# Altium PCB PCB1.PcbDoc (part 1 of 2)
Units mil, origin at the board's own origin, x right, y up, seen from the top; angles counter-clockwise.
Board outline 3937.01 x 3937.01 mil, 4 copper layers (L1, L2, L3, L4), stack 61.811 mil thick; 100 components, 172 nets, 741 pads, 303 vias.
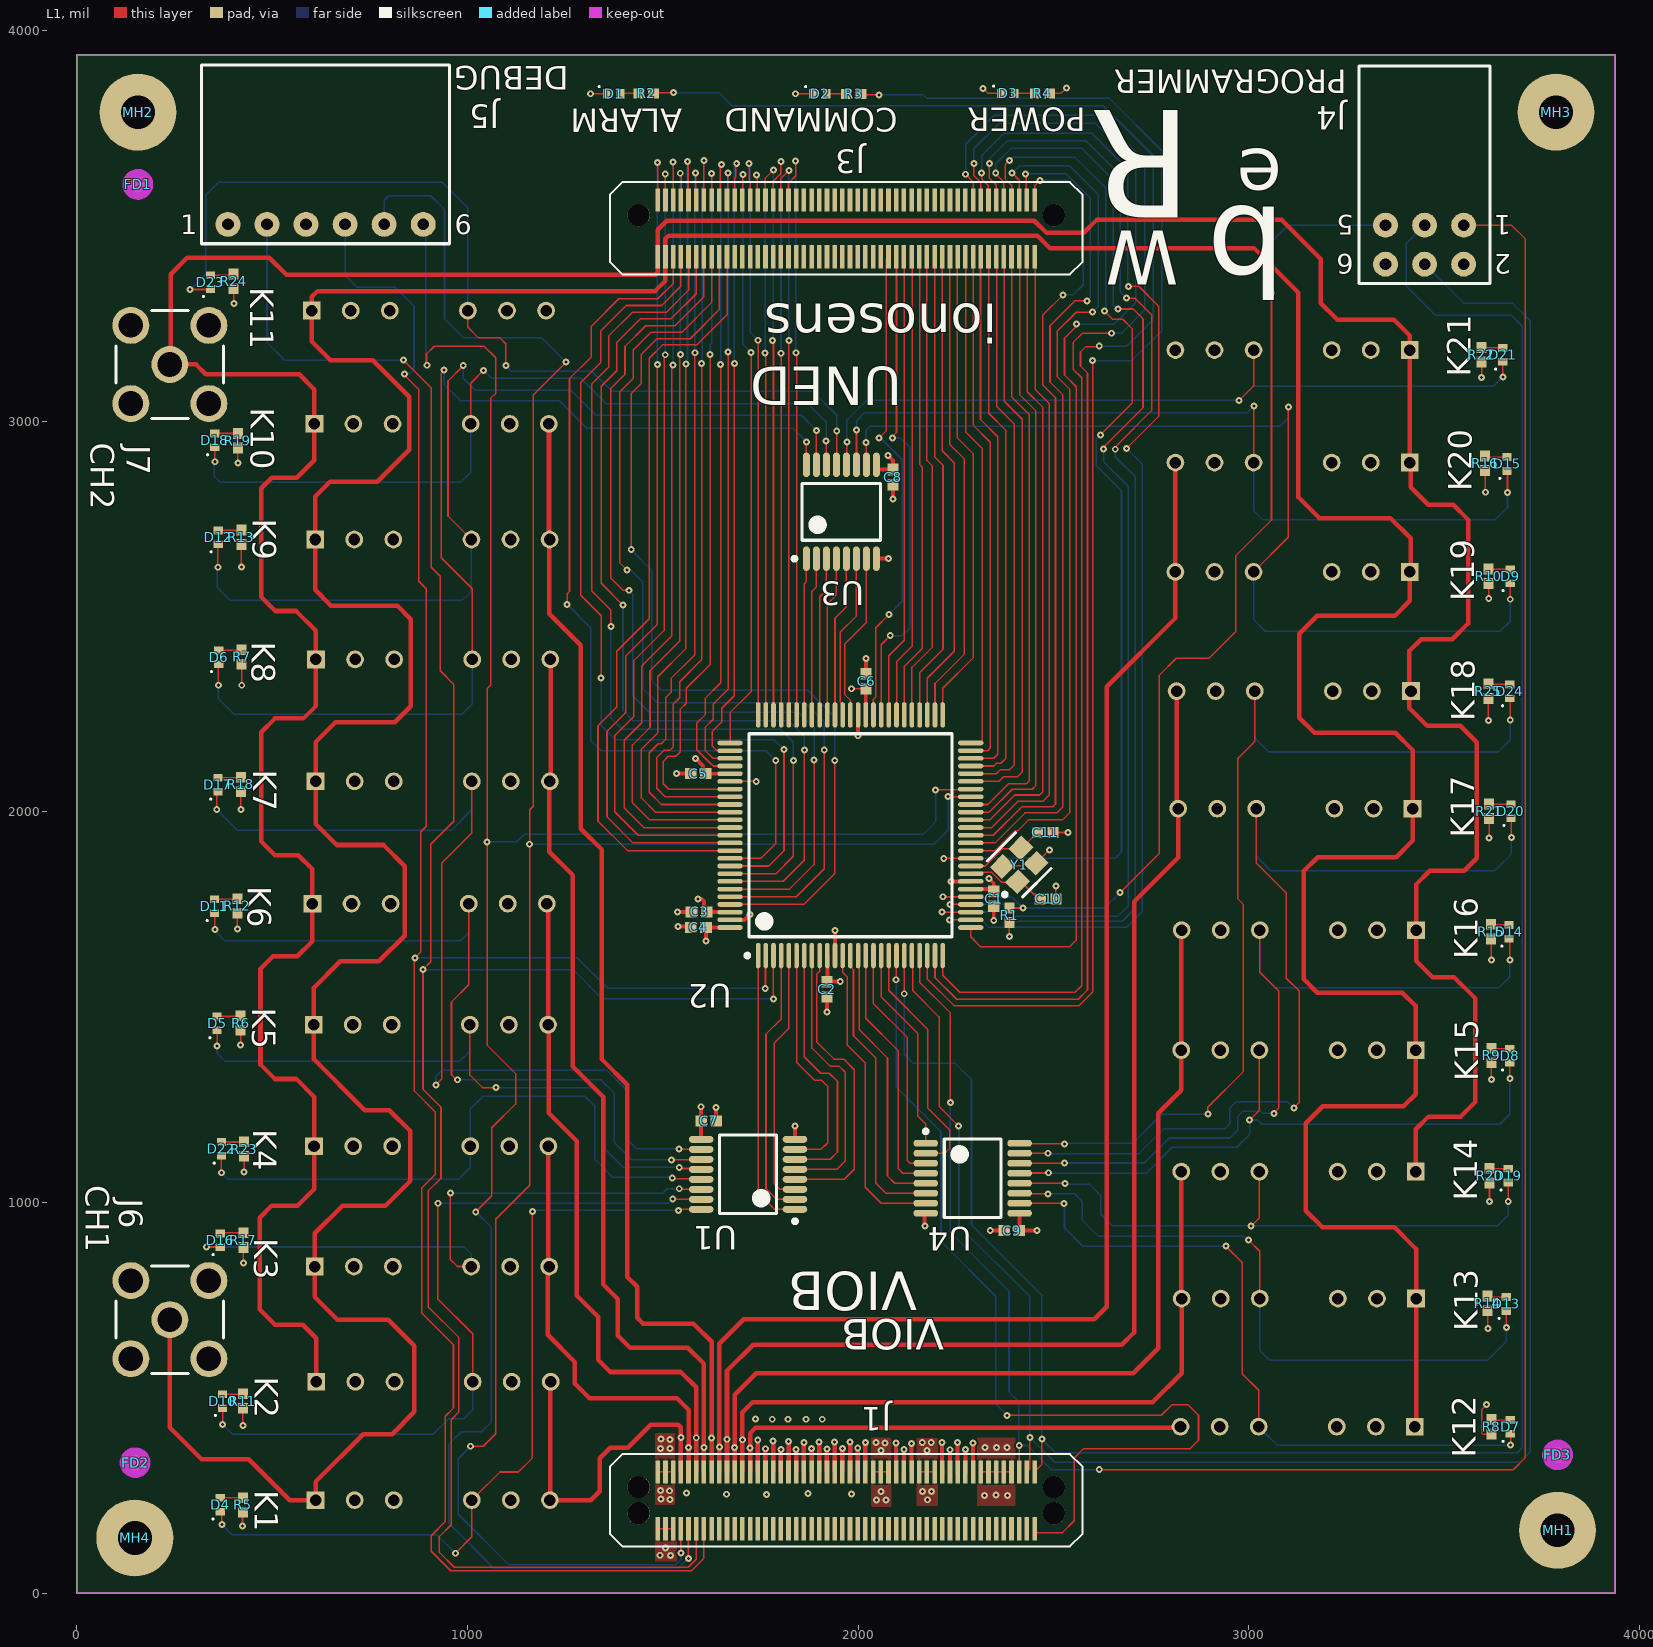
[diagram p0: L1 view]
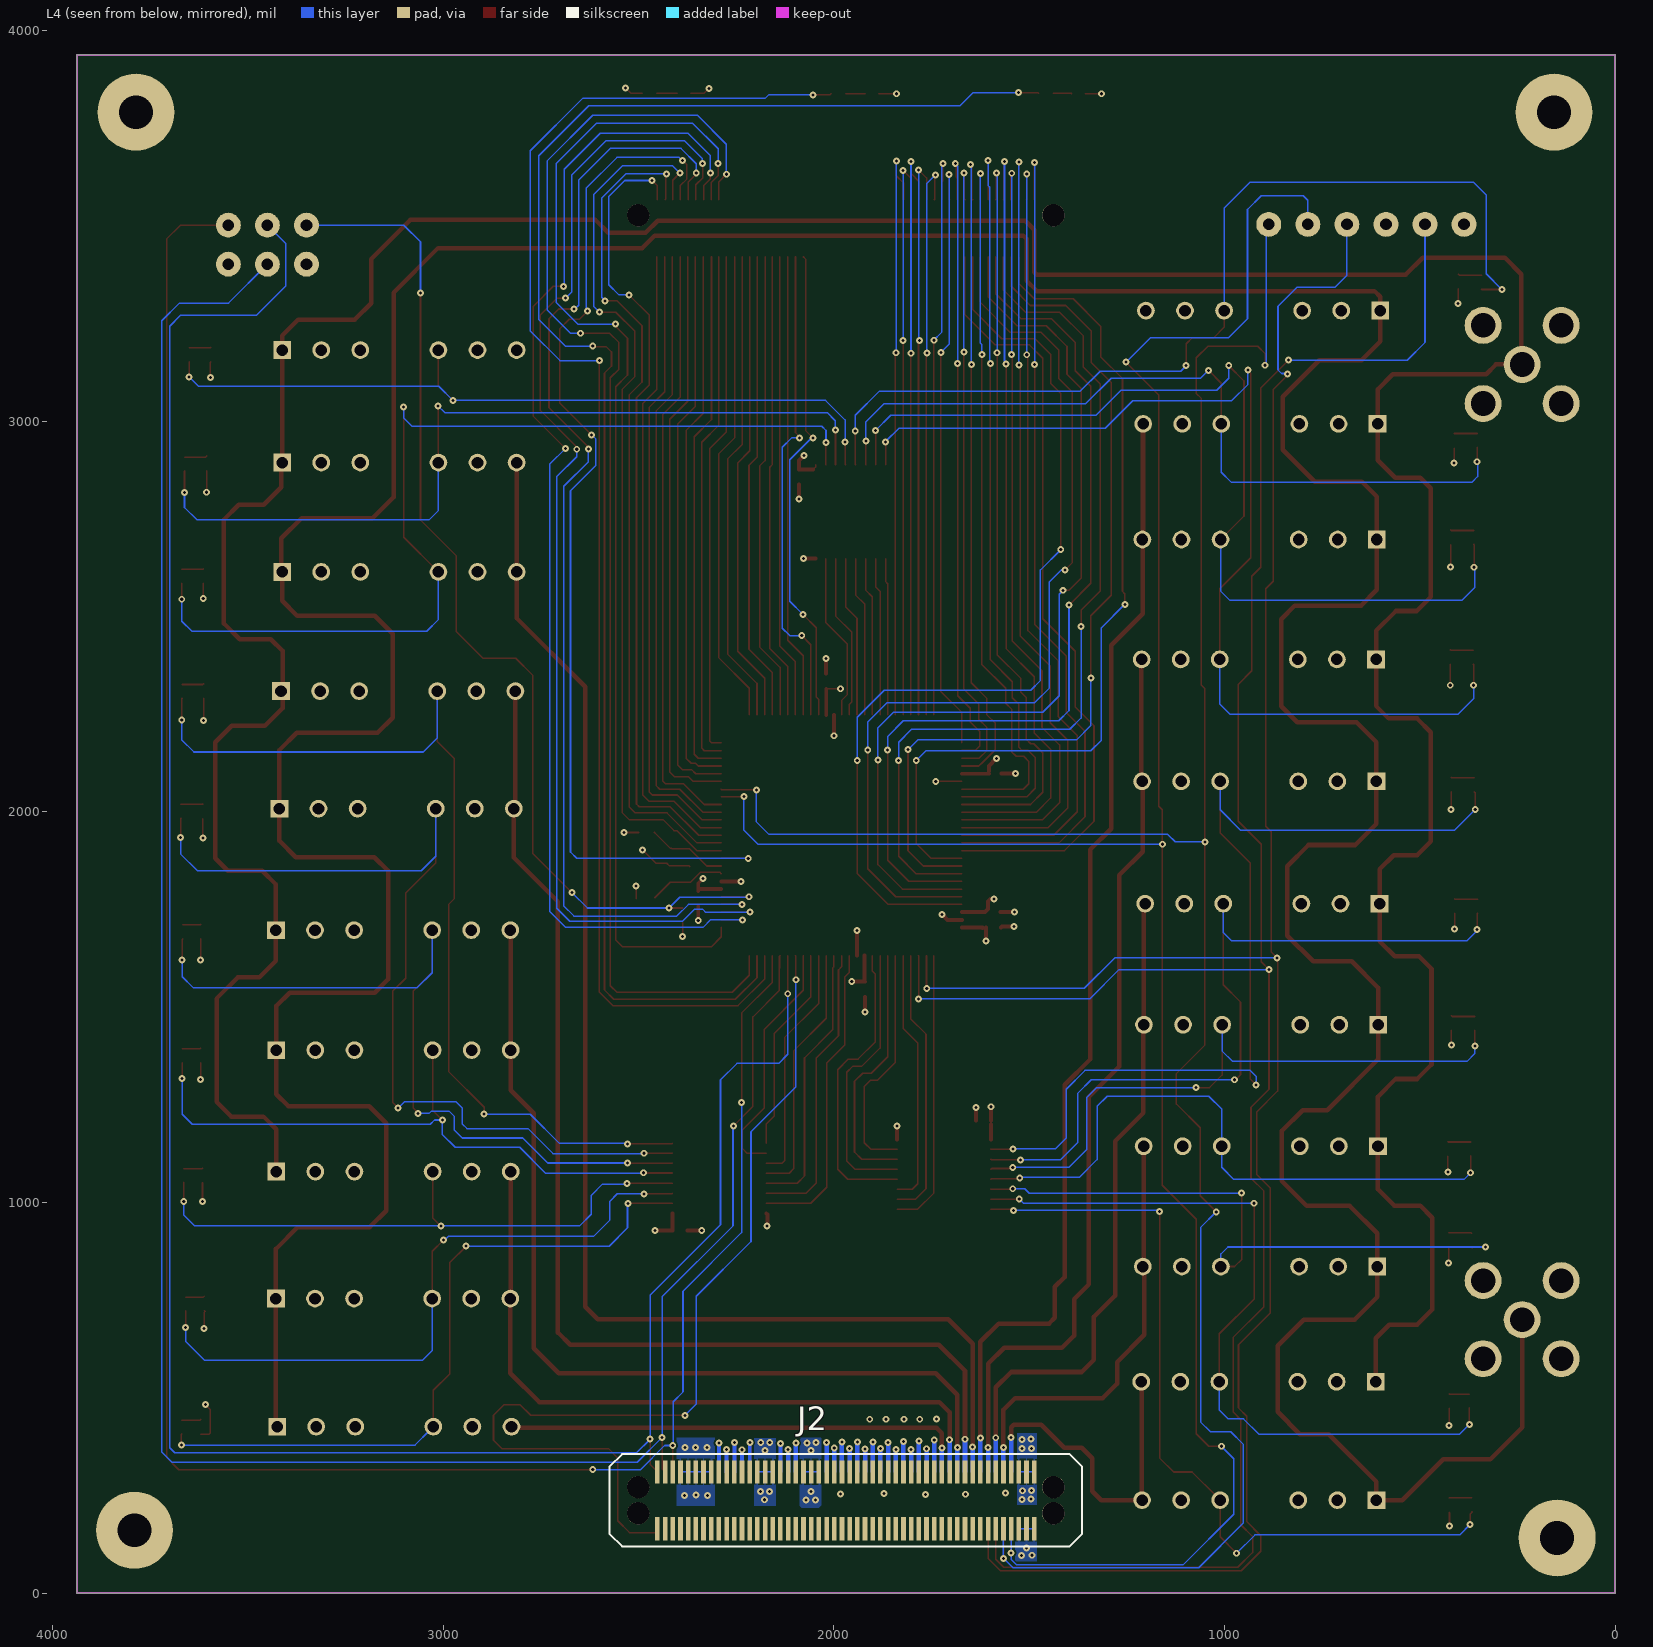
[diagram p1: L4 view, seen from below]
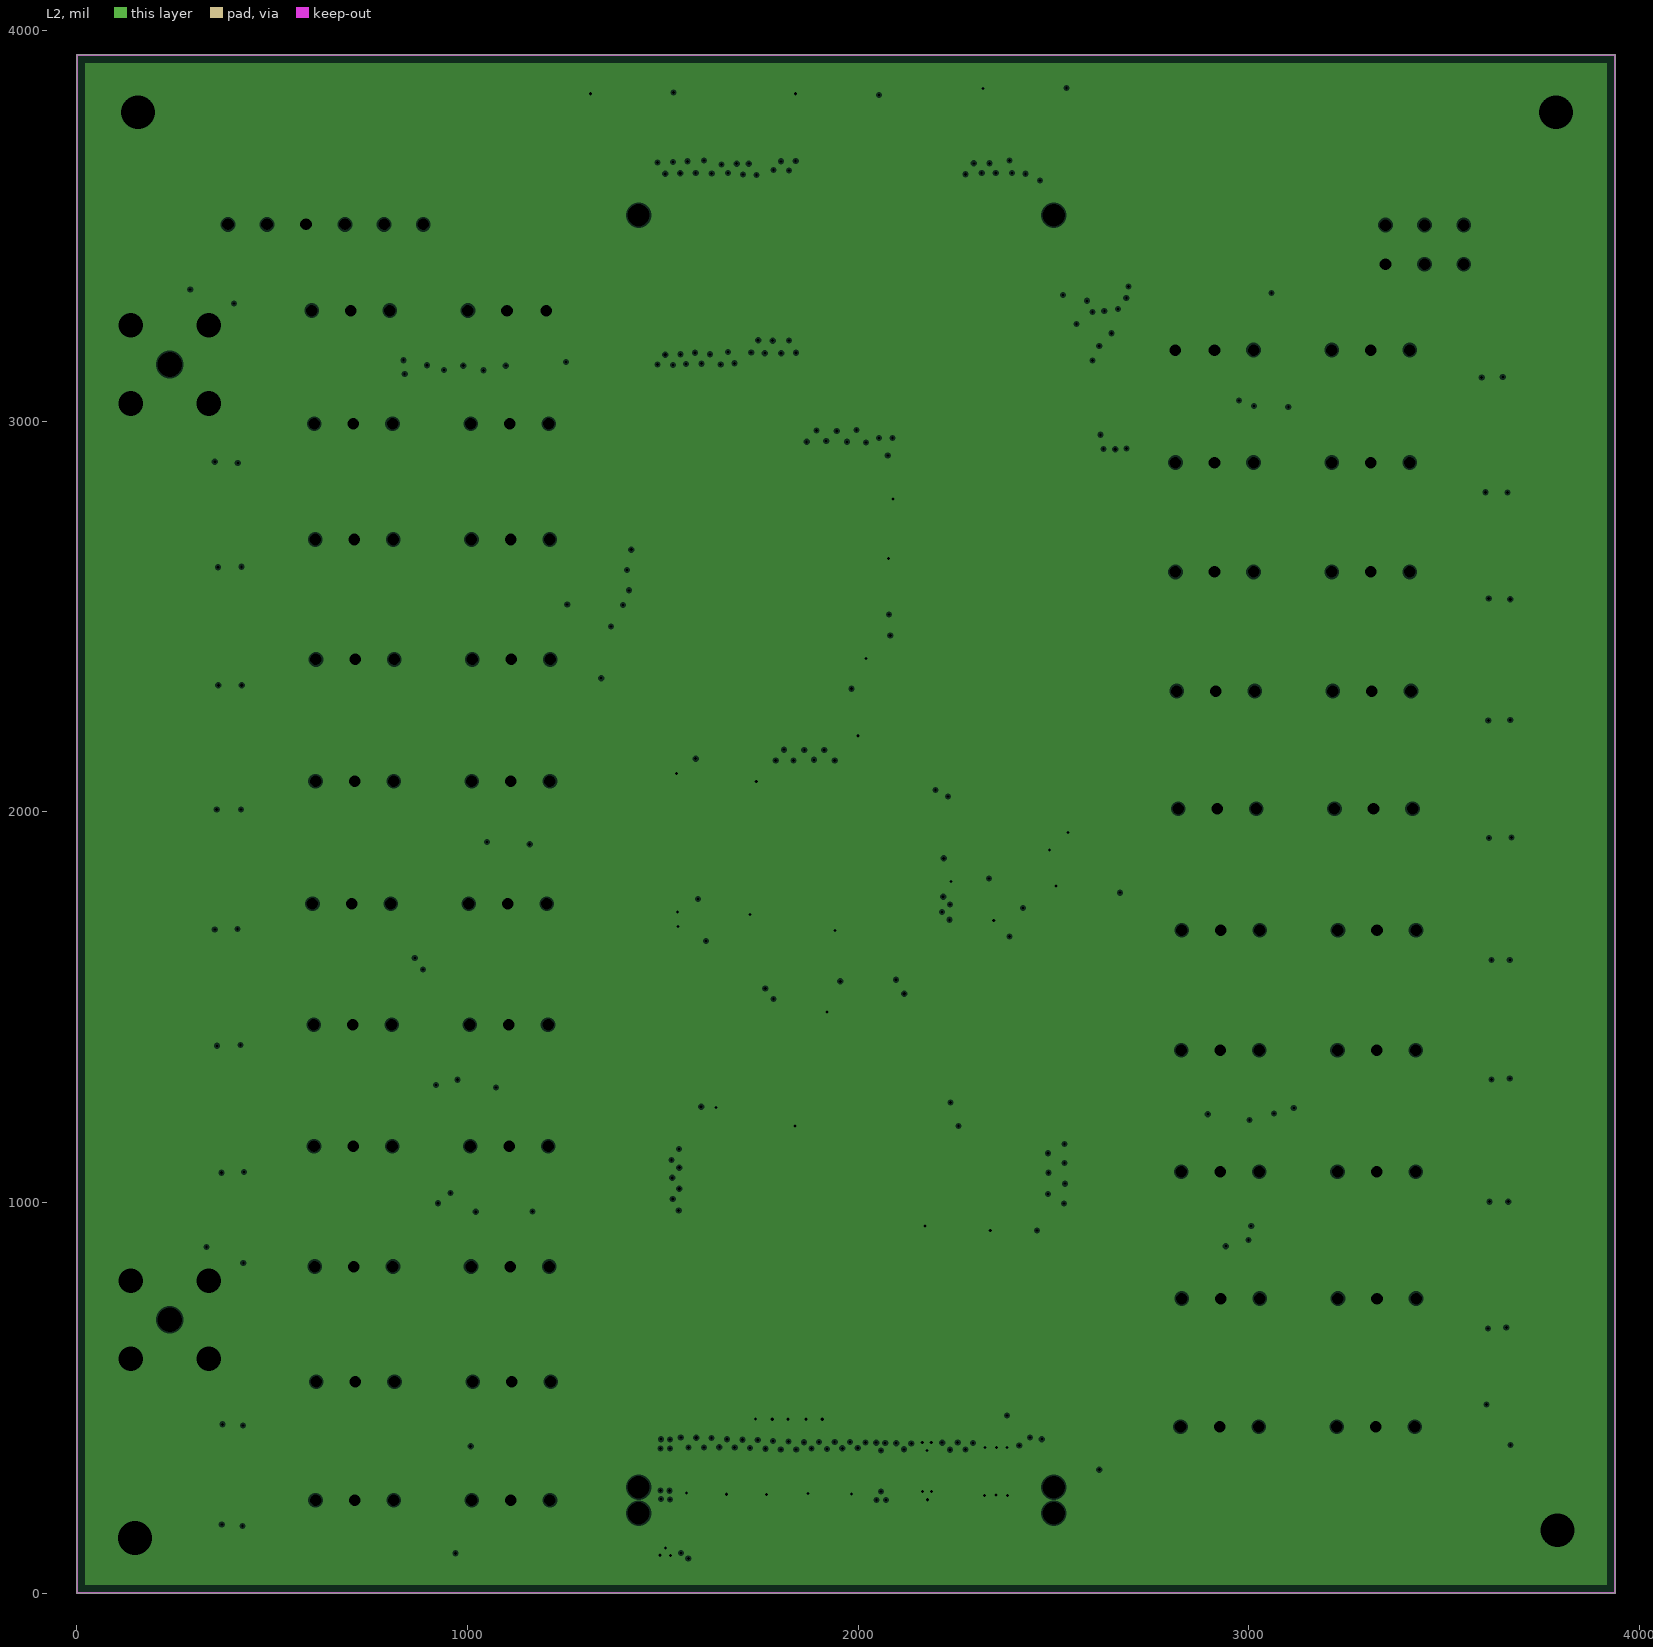
[diagram p2: L2, clearances drawn from the general rule]
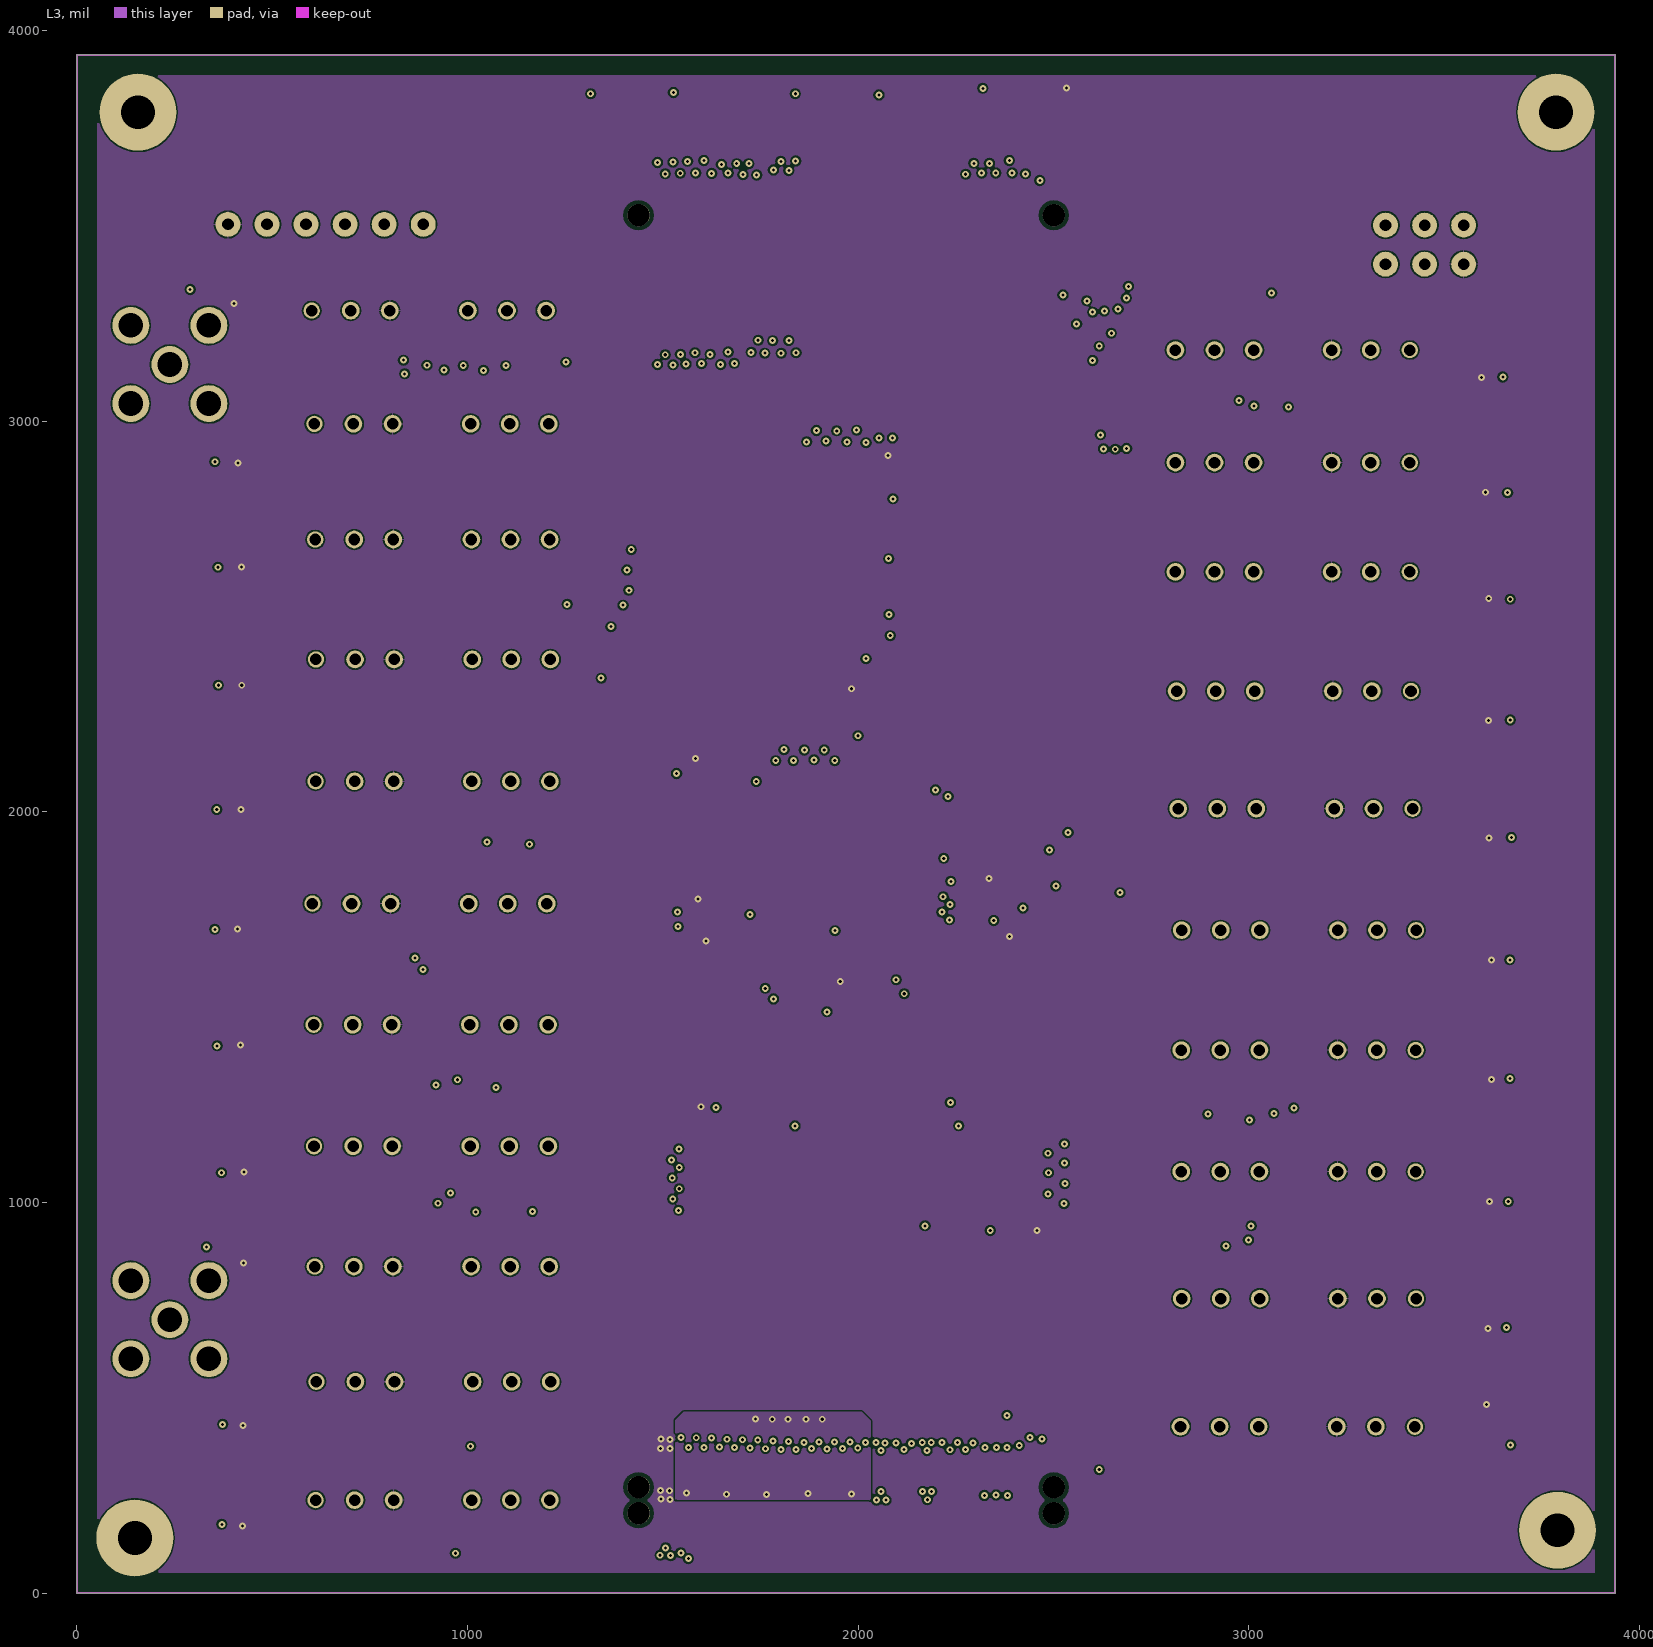
[diagram p3: L3]
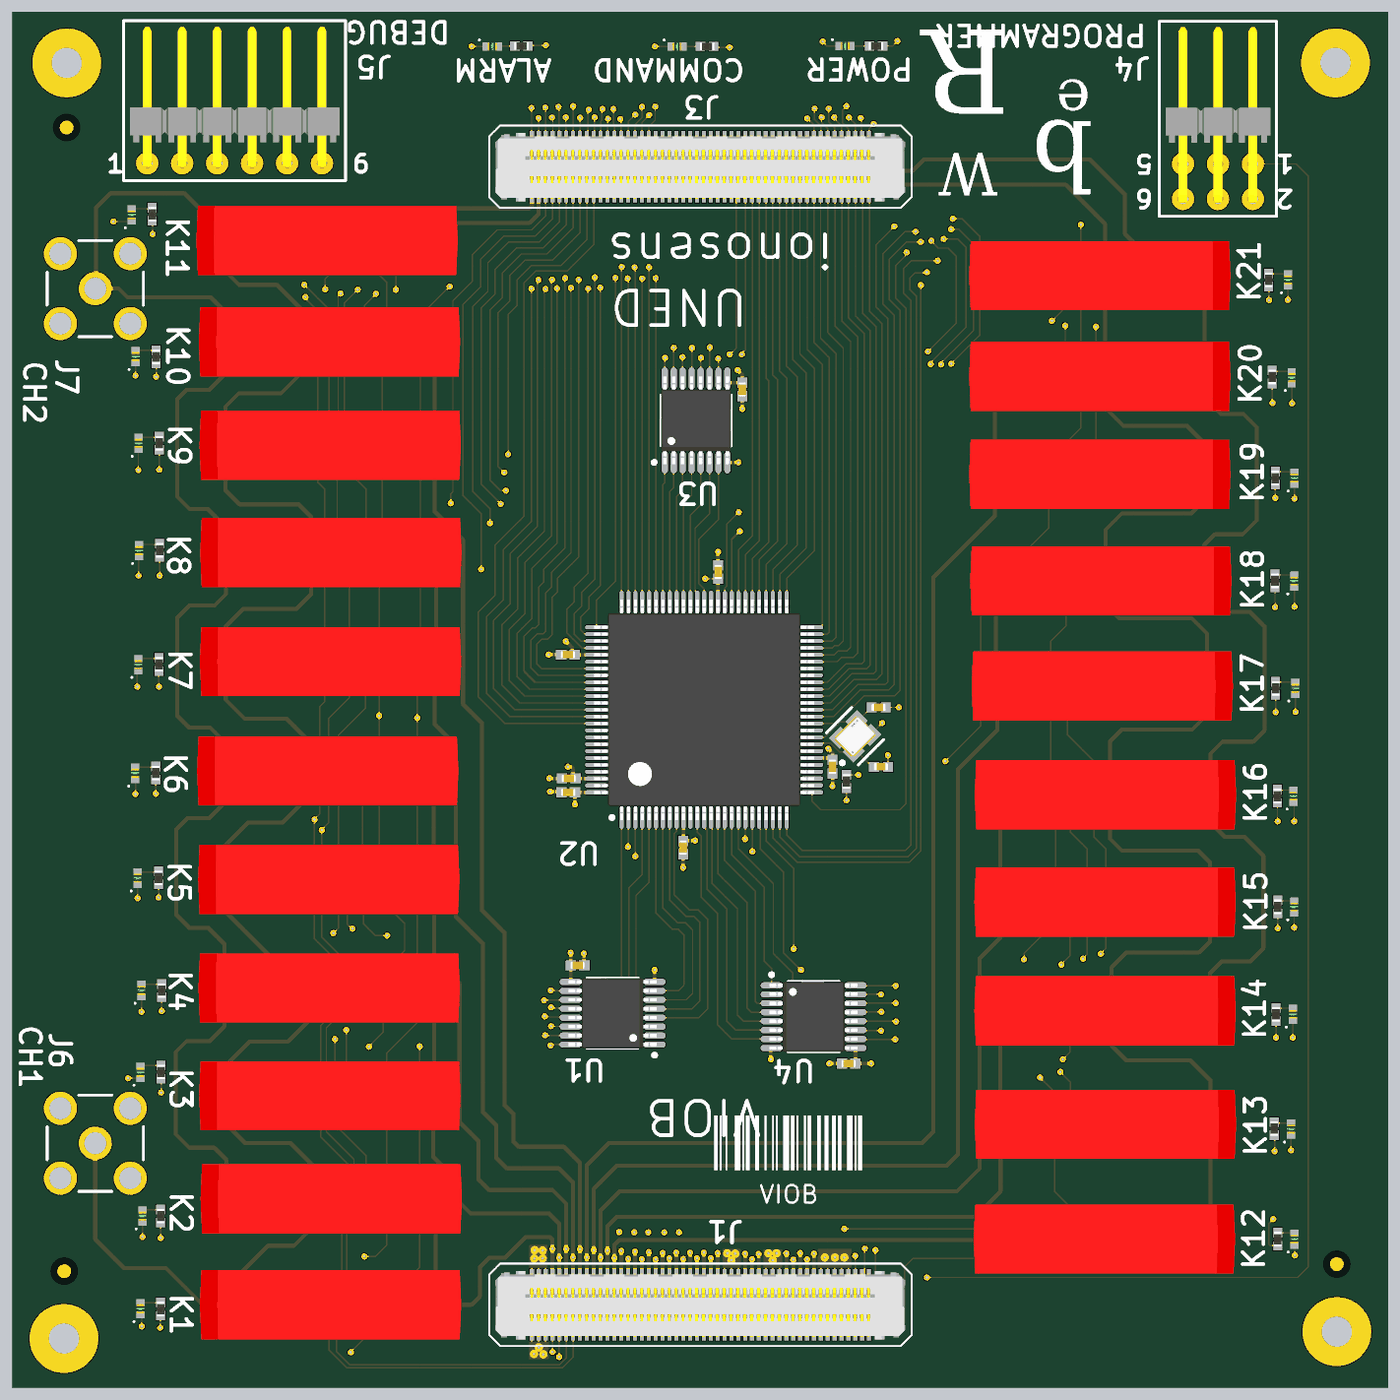
[diagram p5: 3D render of the assembled board from above, using the file's embedded part models]

## Layer stack, top to bottom
Top Mask: solder mask 0.5906, Solder Resist, Dk 3.8
L1: signal copper 1.378
Dielectric 1: prepreg 7.874, 7628, Dk 4.6
L2: plane copper 0.689, net GND
Core: core 41.9291, FR-4, Dk 4.5
L3: signal copper 0.689
Dielectric 2: prepreg 7.874, 7628, Dk 4.6
L4: signal copper 1.378
Bottom Mask: solder mask 0.5906, Solder Resist, Dk 3.8

## Board outline
0.25,0.25 3937.26,0.25 3937.26,3937.26 0.25,3937.26

## Design rules (kind name [scope] priority, off if disabled: settings)
BoardOutlineClearance [All] p1: gap=7.87 ignorepadtopadclearanceinfootprint=FALSE
Clearance Clearance_KeepOut [OnLayer('Keep-Out Layer')] p1: gap=50 ignorepadtopadclearanceinfootprint=FALSE except(9.84: Arc-Hole Track-Hole SMDPad-Hole THPad-Hole Via-Hole Fill-Hole Poly-Hole Region-Hole Text-Hole; 25: Arc-THPad Track-THPad SMDPad-THPad THPad-THPad THPad-Via THPad-Fill THPad-Poly THPad-Region THPad-Text)
Clearance [All] p2: gap=4 ignorepadtopadclearanceinfootprint=FALSE except(5: Arc-Via Track-Via SMDPad-Via THPad-Via Via-Via Via-Fill Via-Poly Via-Region Via-Text; 9.84: Arc-Hole Track-Hole SMDPad-Hole THPad-Hole Via-Hole Fill-Hole Poly-Hole Region-Hole Text-Hole)
ComponentClearance [All] p1: gap=4 collisioncheckmode=3 verticalgap=4 showdistances=TRUE
DiffPairsRouting [All] p1: maxlimit=4 minlimit=4 mostfreqgap=4 toplayer_minwidth=4 toplayer_maxwidth=71497.94 toplayer_prefwidth=4 midlayer1_minwidth=4 midlayer1_maxwidth=71497.94 midlayer1_prefwidth=4 bottomlayer_minwidth=4 bottomlayer_maxwidth=71497.94 bottomlayer_prefwidth=4 maxuncoupledlength=500
Height [All] p1: minheight=0 maxheight=71497.94 prefheight=500
HoleSize [All] p1: absolutevalues=TRUE maxlimit=248.03 minlimit=7.87 maxpercent=80.000 minpercent=20.000
HoleToHoleClearance [All] p1: gap=9.84 allowstackedmicrovias=FALSE
MinimumAnnularRing [All] p1: minimumring=3
MinimumSolderMaskSliver [All] p1: minsoldermaskwidth=0
PlaneClearance [All] p1: clearance=4
PlaneConnect PlaneConnectPowerPads [InPadClass('PowerPads')] p1: planeconnectstyle=Direct reliefexpansion=20 reliefentries=4 reliefconductorwidth=10 reliefairgap=10
PlaneConnect [All] p2: pad.planeconnectstyle=Relief pad.reliefexpansion=11.81 pad.reliefentries=4 pad.reliefconductorwidth=4 pad.reliefairgap=4 via.planeconnectstyle=Direct via.reliefexpansion=11.81 via.reliefentries=4 via.reliefconductorwidth=5 via.reliefairgap=5
PolygonConnect PolygonConnectPowerPads [All vs (InPadClass('PowerPads'))] p1: connectstyle=Direct reliefconductorwidth=10 reliefentries=4 polygonreliefangle="90 Angle" airgapwidth=10
PolygonConnect [All] p2: thpad.connectstyle=Relief thpad.reliefconductorwidth=4 thpad.reliefentries=4 thpad.polygonreliefangle="90 Angle" thpad.airgapwidth=4 smdpad.connectstyle=Relief smdpad.reliefconductorwidth=4 smdpad.reliefentries=4 smdpad.polygonreliefangle="90 Angle" smdpad.airgapwidth=4 via.connectstyle=Direct via.reliefconductorwidth=5 via.reliefentries=4 via.polygonreliefangle="90 Angle" via.airgapwidth=5
RoutingVias [All] p1: holewidth=7.87 width=17.72 viastyle="Through Hole" minholewidth=7.87 minwidth=17.72 maxholewidth=248.03 maxwidth=257.87
SilkToSilkClearance [All] p1: silktosilkclearance=0
SilkToSolderMaskClearance [IsPad] p1: minsilkscreentomaskgap=4 clearancetoexposedcopper=TRUE
SolderMaskExpansion [All] p1: expansion=2.95 istentingtop=FALSE
Width [All] p1: maxlimit=71497.94 minlimit=4 preferedwidth=4
Width Width_50 [InNetClass('Nodes')] p2: maxlimit=12.79 minlimit=10 preferedwidth=11.55 toplayer_minwidth=11.55 bottomlayer_minwidth=11.55 impedanceprofiledriven=TRUE impedanceprofileid={25DF4E35-63DF-4FEA-9BCD-7AAE73DF4366} impedanceprofilevalue=50.000000 minimp=50.000000 maximp=50.000000 favimp=50.000000
20 further rules are at their usual default settings.

## Classes and differential pairs
net class Nodes: A B C D E F G H I J K L M N O P Q R S T U W X Y Z
component class Sheet3: FD1 FD2 FD3 J1 J2 J3 J4 J5 J6 J7 MH1 MH2 MH3 MH4
component class Sheet2: D4 D5 D6 D7 D8 D9 D10 D11 D12 D13 D14 D15 D16 D17 D18 D19 D20 D21 D22 D23 D24 K1 K2 K3 K4 K5 K6 K7 K8 K9 K10 K11 K12 K13 K14 K15 K16 K17 K18 K19 K20 K21 R5 R6 R7 R8 R9 R10 R11 R12 R13 R14 R15 R16 R17 R18 R19 R20 R21 R22 R23 R24 R25
component class Sheet1: C1 C2 C3 C4 C5 C6 C7 C8 C9 C10 C11 D1 D2 D3 R1 R2 R3 R4 U1 U2 U3 U4 Y1

## Components (designator, comment, footprint, x,y, rotation, side; value= is the part's Value field where it differs from the comment)
C1 "CC0402JRX7R7BB104" CAPC1005X06M#1 2347,1777.29 r90 top value=100nF
C2 "CC0402JRX7R7BB104" CAPC1005X06M#1 1920,1545.71 r90 top value=100nF
C3 "CC0402JRX7R7BB104" CAPC1005X06M#1 1592.71,1744 r0 top value=100nF
C4 "CC0402JRX7R7BB104" CAPC1005X06M#1 1591,1704 r0 top value=100nF
C5 "CC0402JRX7R7BB104" CAPC1005X06M#1 1590.29,2098 r0 top value=100nF
C6 "CC0402JRX7R7BB104" CAPC1005X06M#1 2020,2334.29 r270 top value=100nF
C7 "CC0402JRX7R7BB104" CAPC1005X06M#1 1617.71,1209 r180 top value=100nF
C8 "CC0402JRX7R7BB104" CAPC1005X06M#1 2089,2856.71 r90 top value=100nF
C9 "CC0402JRX7R7BB104" CAPC1005X06M#1 2393.29,928 r0 top value=100nF
C10 "CC0402JRNPO9BN200" CAPC1005X06M#2 2486.08,1777 r180 top value=20pF
C11 "CC0402JRNPO9BN200" CAPC1005X06M#2 2479.08,1947 r180 top value=20pF
D1 "SML-P12UTT86R" DIOC1005X02R 1373.62,3838 r0 top
D2 "SML-P12UTT86R" DIOC1005X02R 1902,3838 r0 top
D3 "SML-P12UTT86R" DIOC1005X02R 2383.18,3839 r0 top
D4 "SML-P13PTT86R" DIOC1005X02R 367,226.18 r90 top
D5 "SML-P13PTT86R" DIOC1005X02R 359,1458.18 r90 top
D6 "SML-P13PTT86R" DIOC1005X02R 363,2395.18 r90 top
D7 "SML-P13PTT86R" DIOC1005X02R 3669,425.18 r90 top
D8 "SML-P13PTT86R" DIOC1005X02R 3668,1375.62 r90 top
D9 "SML-P13PTT86R" DIOC1005X02R 3669,2602.62 r90 top
D10 "SML-P13PTT86R" DIOC1005X02R 373,491.62 r90 top
D11 "SML-P13PTT86R" DIOC1005X02R 352,1758.18 r90 top
D12 "SML-P13PTT86R" DIOC1005X02R 362,2702.18 r90 top
D13 "SML-P13PTT86R" DIOC1005X02R 3659,740 r90 top
D14 "SML-P13PTT86R" DIOC1005X02R 3666,1692.62 r90 top
D15 "SML-P13PTT86R" DIOC1005X02R 3661,2890.18 r90 top
D16 "SML-P13PTT86R" DIOC1005X02R 367,902.88 r90 top
D17 "SML-P13PTT86R" DIOC1005X02R 361,2069.18 r90 top
D18 "SML-P13PTT86R" DIOC1005X02R 353,2950.62 r90 top
D19 "SML-P13PTT86R" DIOC1005X02R 3664,1068.62 r90 top
D20 "SML-P13PTT86R" DIOC1005X02R 3671,2001.62 r90 top
D21 "SML-P13PTT86R" DIOC1005X02R 3650,3169.62 r90 top
D22 "SML-P13PTT86R" DIOC1005X02R 370,1137 r90 top
D23 "SML-P13PTT86R" DIOC1005X02R 342,3355.7 r90 top
D24 "SML-P13PTT86R" DIOC1005X02R 3668,2308 r90 top
FD1 "FID1X2R" FID1X2R 156,3606 r90 top
FD2 "FID1X2R" FID1X2R 149,334 r90 top
FD3 "FID1X2R" FID1X2R 3790,354 r90 top
J1 "LSHM-150-06.0-L-DV-A-N-K-TR" LSHM_150_06_0_L_DV_A_N_K_TR 1969.25,237.68 r180 top
J2 "LSHM-150-06.0-L-DV-A-N-K-TR" LSHM_150_06_0_L_DV_A_N_K_TR 1969.25,237.68 r180 bottom
J3 "LSHM-150-06.0-L-DV-A-N-K-TR" LSHM_150_06_0_L_DV_A_N_K_TR 1969.25,3493.58 r180 top
J4 "TSW-103-08-F-D-RA" TSW-103-08-F-D-RA 3449.92,3611.69 r180 top
J5 "HTSW-106-08-F-S-RA" TSW-106-08-F-S-RA 636.57,3613.66 r0 top
J6 "SMA-J-P-H-RA-TH1" SMA-J-P-H-RA-TH1 238,700 r0 top
J7 "SMA-J-P-H-RA-TH1" SMA-J-P-H-RA-TH1 238,3145 r0 top
K1 "9002-05-00" "SIP564W40P254L1980H810Q6 - Cloned" 911,238 r0 top
K2 "9002-05-00" "SIP564W40P254L1980H810Q6 - Cloned" 913,541 r0 top
K3 "9002-05-00" "SIP564W40P254L1980H810Q6 - Cloned" 909,836 r0 top
K4 "9002-05-00" "SIP564W40P254L1980H810Q6 - Cloned" 907,1144 r0 top
K5 "9002-05-00" "SIP564W40P254L1980H810Q6 - Cloned" 906,1455 r0 top
K6 "9002-05-00" "SIP564W40P254L1980H810Q6 - Cloned" 903,1765 r0 top
K7 "9002-05-00" "SIP564W40P254L1980H810Q6 - Cloned" 911,2078 r0 top
K8 "9002-05-00" "SIP564W40P254L1980H810Q6 - Cloned" 912,2390 r0 top
K9 "9002-05-00" "SIP564W40P254L1980H810Q6 - Cloned" 910,2697 r0 top
K10 "9002-05-00" "SIP564W40P254L1980H810Q6 - Cloned" 908,2993 r0 top
K11 "9002-05-00" "SIP564W40P254L1980H810Q6 - Cloned" 901,3283 r0 top
K12 "9002-05-00" "SIP564W40P254L1980H810Q6 - Cloned" 3125,426 r180 top
K13 "9002-05-00" "SIP564W40P254L1980H810Q6 - Cloned" 3128,754 r180 top
K14 "9002-05-00" "SIP564W40P254L1980H810Q6 - Cloned" 3127,1079 r180 top
K15 "9002-05-00" "SIP564W40P254L1980H810Q6 - Cloned" 3127,1390 r180 top
K16 "9002-05-00" "SIP564W40P254L1980H810Q6 - Cloned" 3128,1697 r180 top
K17 "9002-05-00" "SIP564W40P254L1980H810Q6 - Cloned" 3119,2008 r180 top
K18 "9002-05-00" "SIP564W40P254L1980H810Q6 - Cloned" 3115,2309 r180 top
K19 "9002-05-00" "SIP564W40P254L1980H810Q6 - Cloned" 3112,2614 r180 top
K20 "9002-05-00" "SIP564W40P254L1980H810Q6 - Cloned" 3112,2894 r180 top
K21 "9002-05-00" "SIP564W40P254L1980H810Q6 - Cloned" 3112,3182 r180 top
MH1 "C500h220" C500h220z368#1 3790,161 r0 top
MH2 "C500h220" C500h220z368#2 156,3792 r0 top
MH3 "C500h220" C500h220z368#3 3787,3791 r0 top
MH4 "C500h220" C500h220z368#4 149,142 r0 top
R1 "AC0402FR-0710KL" RESC1005X04M 2387,1735 r270 top value=10k
R2 "AC0402FR-07240RL" RESC1005X04M 1457.3,3839 r180 top value=240
R3 "AC0402FR-07240RL" RESC1005X04M 1988.3,3838 r180 top value=240
R4 "AC0402FR-07240RL" RESC1005X04M 2471.7,3839 r180 top value=240
R5 "AC0402FR-07240RL" RESC1005X04M 425,225.7 r90 top value=240
R6 "AC0402FR-07240RL" RESC1005X04M 419,1459.3 r90 top value=240
R7 "AC0402FR-07240RL" RESC1005X04M 422,2396.3 r90 top value=240
R8 "AC0402FR-07240RL" RESC1005X04M 3621,425.7 r90 top value=240
R9 "AC0402FR-07240RL" RESC1005X04M 3621,1376.3 r90 top value=240
R10 "AC0402FR-07240RL" RESC1005X04M 3614,2603 r90 top value=240
R11 "AC0402FR-07240RL" RESC1005X04M 425,491.7 r90 top value=240
R12 "AC0402FR-07240RL" RESC1005X04M 411,1759 r90 top value=240
R13 "AC0402FR-07240RL" RESC1005X04M 421,2702.7 r90 top value=240
R14 "AC0402FR-07240RL" RESC1005X04M 3611,741.7 r90 top value=240
R15 "AC0402FR-07240RL" RESC1005X04M 3620,1693.3 r90 top value=240
R16 "AC0402FR-07240RL" RESC1005X04M 3605,2892 r90 top value=240
R17 "AC0402FR-07240RL" RESC1005X04M 426,903.7 r90 top value=240
R18 "AC0402FR-07240RL" RESC1005X04M 420,2070 r90 top value=240
R19 "AC0402FR-07240RL" RESC1005X04M 412,2949.7 r90 top value=240
R20 "AC0402FR-07240RL" RESC1005X04M 3616,1068.7 r90 top value=240
R21 "AC0402FR-07240RL" RESC1005X04M 3615,2001.3 r90 top value=240
R22 "AC0402FR-07240RL" RESC1005X04M 3595,3170 r90 top value=240
R23 "AC0402FR-07240RL" RESC1005X04M 428,1136.7 r90 top value=240
R24 "AC0402FR-07240RL" RESC1005X04M 401,3357.7 r90 top value=240
R25 "AC0402FR-07240RL" RESC1005X04M 3613,2309 r90 top value=240
U1 "ULN2003AIPWR" TSOP65P640X120-16M 1718,1072 r180 top
U2 "ATMEGA2560-16AU" ATML-100A_M 1980,1940 r90 top
U3 "ULN2003AIPWR" TSOP65P640X120-16M 1957,2768 r90 top
U4 "ULN2003AIPWR" TSOP65P640X120-16M 2293,1062 r0 top
Y1 "Q24FA20H0024700" FA-20H 2412.18,1864.15 r45 top

## Footprints (in the part's own frame and the unit in brackets; to place one, negate y for a bottom-side part, rotate by r counter-clockwise, add the part's x,y. Pads: shape width x height; smd on the part's side, far side on the other; paste and mask are expansions set on the pad)
ATML-100A_M [mm] "TQFP, 100-Leads, Body 14x14mm, Pitch 0.5mm, IPC Low Density"
  oval 1.65x0.3 smd: 1(-7.825,6) 2(-7.825,5.5) 3(-7.825,5) 4(-7.825,4.5) 5(-7.825,4) 6(-7.825,3.5) 7(-7.825,3) 8(-7.825,2.5) 9(-7.825,2) 10(-7.825,1.5) 11(-7.825,1) 12(-7.825,0.5) 13(-7.825,0) 14(-7.825,-0.5) 15(-7.825,-1) 16(-7.825,-1.5) 17(-7.825,-2) 18(-7.825,-2.5) 19(-7.825,-3) 20(-7.825,-3.5) 21(-7.825,-4) 22(-7.825,-4.5) 23(-7.825,-5) 24(-7.825,-5.5) 25(-7.825,-6) 51(7.825,-6) 52(7.825,-5.5) 53(7.825,-5) 54(7.825,-4.5) 55(7.825,-4) 56(7.825,-3.5) 57(7.825,-3) 58(7.825,-2.5) 59(7.825,-2) 60(7.825,-1.5) 61(7.825,-1) 62(7.825,-0.5) 63(7.825,0) 64(7.825,0.5) 65(7.825,1) 66(7.825,1.5) 67(7.825,2) 68(7.825,2.5) 69(7.825,3) 70(7.825,3.5) 71(7.825,4) 72(7.825,4.5) 73(7.825,5) 74(7.825,5.5) 75(7.825,6)
  oval 0.3x1.65 smd: 26(-6,-7.825) 27(-5.5,-7.825) 28(-5,-7.825) 29(-4.5,-7.825) 30(-4,-7.825) 31(-3.5,-7.825) 32(-3,-7.825) 33(-2.5,-7.825) 34(-2,-7.825) 35(-1.5,-7.825) 36(-1,-7.825) 37(-0.5,-7.825) 38(0,-7.825) 39(0.5,-7.825) 40(1,-7.825) 41(1.5,-7.825) 42(2,-7.825) 43(2.5,-7.825) 44(3,-7.825) 45(3.5,-7.825) 46(4,-7.825) 47(4.5,-7.825) 48(5,-7.825) 49(5.5,-7.825) 50(6,-7.825) 76(6,7.825) 77(5.5,7.825) 78(5,7.825) 79(4.5,7.825) 80(4,7.825) 81(3.5,7.825) 82(3,7.825) 83(2.5,7.825) 84(2,7.825) 85(1.5,7.825) 86(1,7.825) 87(0.5,7.825) 88(0,7.825) 89(-0.5,7.825) 90(-1,7.825) 91(-1.5,7.825) 92(-2,7.825) 93(-2.5,7.825) 94(-3,7.825) 95(-3.5,7.825) 96(-4,7.825) 97(-4.5,7.825) 98(-5,7.825) 99(-5.5,7.825) 100(-6,7.825)
  silkscreen extent -7.95,-6.6 6.6,6.82, body extent -8,-8 8,8, height 1.2
C500h220z368#1 [mm] "C500h220z368 hole"
  round 5 hole 2.2: 1(0.003,-0.002)
C500h220z368#2 [mm] "C500h220z368 hole"
  round 5 hole 2.2: 1(0.007,-0.03)
C500h220z368#3 [mm] "C500h220z368 hole"
  round 5 hole 2.2: 1(-0.021,-0.004)
C500h220z368#4 [mm] "C500h220z368 hole"
  round 5 hole 2.2: 1(-0.016,-0.02)
CAPC1005X06M#1 [mm] "Chip Capacitor, 2-Leads, Body 1,00x0,50mm, IPC Low Density"
  rect 0.76x0.72 smd: 1(-0.49,0) 2(0.49,0)
  body extent -0.53,-0.28 0.53,0.28, height 0.55
CAPC1005X06M#2 [mm] "Chip Capacitor, 2-Leads, Body 1,00x0,50mm, IPC Low Density"
  rect 0.72x0.72 smd: 1(-0.51,0) 2(0.51,0)
  body extent -0.53,-0.28 0.53,0.28, height 0.55
DIOC1005X02R [mm] "Chip Diode, 2-Leads, Body 1,00x0,50mm, Manufacturer Recommended"
  rect 0.5x0.6 smd paste+0 mask+0: 1(-0.447,0) 2(0.453,0)
  silkscreen extent -0.98,0.42 -0.88,0.52, body extent -0.8,-0.43 0.8,0.43, height 0.25
FA-20H [mm] "SEIKO EPSON CRYSTAL"
  rect 1.2x1.1 smd paste+0 mask+0: 1(-0.85,-0.7) 2(0.85,-0.7) 3(0.85,0.7) 4(-0.85,0.7)
  silkscreen extent -2.15,-1.63 1.3,1.65, body extent -1.55,-1.35 1.55,1.35, height 0.25
FID1X2R [mm] "Fiducial - Round 1x2mm"
  round 1 smd paste-0.5 mask+0.5: 0(0,0)
  L1 keep-out circle w1: c0,0 r0.5
LSHM_150_06_0_L_DV_A_N_K_TR [mm] "LSHM_150_06_0_L_DV_A_N_K_TR Without Shield"
  rect 0.3x1.5 smd: 1(12.25,-1.85) 2(12.25,1.85) 3(11.75,-1.85) 4(11.75,1.85) 5(11.25,-1.85) 6(11.25,1.85) 7(10.75,-1.85) 8(10.75,1.85) 9(10.25,-1.85) 10(10.25,1.85) 11(9.75,-1.85) 12(9.75,1.85) 13(9.25,-1.85) 14(9.25,1.85) 15(8.75,-1.85) 16(8.75,1.85) 17(8.25,-1.85) 18(8.25,1.85) 19(7.75,-1.85) 20(7.75,1.85) 21(7.25,-1.85) 22(7.25,1.85) 23(6.75,-1.85) 24(6.75,1.85) 25(6.25,-1.85) 26(6.25,1.85) 27(5.75,-1.85) 28(5.75,1.85) 29(5.25,-1.85) 30(5.25,1.85) 31(4.75,-1.85) 32(4.75,1.85) 33(4.25,-1.85) 34(4.25,1.85) 35(3.75,-1.85) 36(3.75,1.85) 37(3.25,-1.85) 38(3.25,1.85) 39(2.75,-1.85) 40(2.75,1.85) 41(2.25,-1.85) 42(2.25,1.85) 43(1.75,-1.85) 44(1.75,1.85) 45(1.25,-1.85) 46(1.25,1.85) 47(0.75,-1.85) 48(0.75,1.85) 49(0.25,-1.85) 50(0.25,1.85) 51(-0.25,-1.85) 52(-0.25,1.85) 53(-0.75,-1.85) 54(-0.75,1.85) 55(-1.25,-1.85) 56(-1.25,1.85) 57(-1.75,-1.85) 58(-1.75,1.85) 59(-2.25,-1.85) 60(-2.25,1.85) 61(-2.75,-1.85) 62(-2.75,1.85) 63(-3.25,-1.85) 64(-3.25,1.85) 65(-3.75,-1.85) 66(-3.75,1.85) 67(-4.25,-1.85) 68(-4.25,1.85) 69(-4.75,-1.85) 70(-4.75,1.85) 71(-5.25,-1.85) 72(-5.25,1.85) 73(-5.75,-1.85) 74(-5.75,1.85) 75(-6.25,-1.85) 76(-6.25,1.85) 77(-6.75,-1.85) 78(-6.75,1.85) 79(-7.25,-1.85) 80(-7.25,1.85) 81(-7.75,-1.85) 82(-7.75,1.85) 83(-8.25,-1.85) 84(-8.25,1.85) 85(-8.75,-1.85) 86(-8.75,1.85) 87(-9.25,-1.85) 88(-9.25,1.85) 89(-9.75,-1.85) 90(-9.75,1.85) 91(-10.25,-1.85) 92(-10.25,1.85) 93(-10.75,-1.85) 94(-10.75,1.85) 95(-11.25,-1.85) 96(-11.25,1.85) 97(-11.75,-1.85) 98(-11.75,1.85) 99(-12.25,-1.85) 100(-12.25,1.85)
  round 1.45 hole 1.45 unplated: ""(-13.5,-0.85) ""(13.5,-0.85)
  silkscreen extent -15.35,-3 15.35,3, body extent -14.88,-2.46 14.92,2.52, height 7.3
RESC1005X04M [mm] "Chip Resistor, 2-Leads, Body 1,00x0,50mm, IPC Low Density"
  rect 0.7x0.65 smd: 1(-0.475,0) 2(0.475,0)
  body extent -0.53,-0.28 0.53,0.28, height 0.37
"SIP564W40P254L1980H810Q6 - Cloned" [mil] "SIP, 2.54 mm pitch; 7 pin, 19.80 mm L X 5.64 mm W X 8.10 mm H body"
  rect 45.28x45.28 / inner round 41.83 / far side rect 45.28x45.28 hole 29.53: 1(-300,0)
  round 45.28 hole 29.53: 2(-100,0) 3(100,0) 4(300,0) 5(-200,0) 6(200,0)
  body extent -374,-99 374,99, height 300
SMA-J-P-H-RA-TH1 [mm] "Conn SMA RCP 0Hz to 18GHz 50Ohm Solder RA Thru-Hole Gold"
  round 2.4 hole 1.6: 1(0,0) 2(2.54,-2.54) 3(2.54,2.54) 4(-2.54,2.54) 5(-2.54,-2.54)
  silkscreen extent -3.5,-3.5 3.5,3.5, body extent -11.6,-3.5 3.5,3.5, height 9.85
TSOP65P640X120-16M [mm] "TSOP, 16-Leads, Body 5,00x4,40mm, Pitch 0,65mm, IPC Low Density"
  oval 1.6x0.45 smd: 1(-3.05,2.275) 2(-3.05,1.625) 3(-3.05,0.975) 4(-3.05,0.325) 5(-3.05,-0.325) 6(-3.05,-0.975) 7(-3.05,-1.625) 8(-3.05,-2.275) 9(3.05,-2.275) 10(3.05,-1.625) 11(3.05,-0.975) 12(3.05,-0.325) 13(3.05,0.325) 14(3.05,0.975) 15(3.05,1.625) 16(3.05,2.275)
  silkscreen extent -3.18,-2.55 1.85,3.17, body extent -3.2,-2.55 3.2,2.55, height 1.2
TSW-103-08-F-D-RA [mil] "6 Pin Header Vertical, right-angle"
  round 63.78 hole 30: 1(-100,110) 2(-100,210) 3(0,110) 4(0,210) 5(100,110) 6(100,210)
  silkscreen extent -168,-298 168,260, body extent -150,-281 150,221, height 218
TSW-106-08-F-S-RA [mil] "6 Pin Header, right-angle, 1 row"
  round 63.78 hole 30: 1(-250,-110) 2(-150,-110) 3(-50,-110) 4(50,-110) 5(150,-110) 6(250,-110)
  silkscreen extent -318,-160 318,298, body extent -300,-122 300,280, height 121

## Part data
C1 C2 C3 C4 C5 C6 C7 C8 C9: library part C01-0402-01-00001-1, "Cap Ceramic 100nF 50V X7R 5% SMD 0402 125°C", Capacitor Type=Ceramic, Case/Package=0402, Dielectric=X7R, Manufacturer=YAGEO, Max Operating Temperature=125°C, Min Operating Temperature=-55°C, Tolerance=5%, Voltage Rating=16V, Composition=Ceramic, Depth=500µm, Length=1mm, Manufacturer P/N=CC0402JRX7R7BB104, Mount="Surface Mount", Mounting Technology="Surface Mount", Pins=2, RoHS Compliant=Yes, Termination=SMD/SMT, Thickness=558.8µm, Voltage Rating (DC)=16V, Width=508µm
C10 C11: library part C01-0402-01-00008-1, "Cap Ceramic 20pF 50V C0G 5% SMD 0402 125°C", Capacitor Type=Ceramic, Case/Package=0402, Dielectric=COG, Manufacturer=YAGEO, Max Operating Temperature=125°C, Min Operating Temperature=-55°C, Tolerance=5%, Voltage Rating=50V, Composition=Ceramic, Depth=500µm, Length=990.6µm, Manufacturer P/N=CC0402JRNPO9BN200, Mount="Surface Mount", Mounting Technology="Surface Mount", Pins=2, RoHS Compliant=Yes, Termination=SMD/SMT, Thickness=558.8µm, Voltage Rating (DC)=50V, Width=508µm
D1 D2 D3: library part D01-0402-01-00001-1, "Led red 0402", Case/Package=0402, Colour=red, Forward Current="20 mA", Forward Voltage=2V, Manufacturer=ROHM, Max Operating Temperature=85°C, Max Power Dissipation=52mW, Min Operating Temperature=-40°C, Dominant Wavelength="620 nm", Lens Style="Rectangular, Square", Luminous Intensity="85 mcd", Manufacturer P/N=SML-P12UTT86R, Mounting Technology=SMD, Number of LEDs=1, Pins=2, RoHS Compliant=Yes
D4 D5 D6 D7 D8 D9 D10 D11 D12 D13 D14 D15 D16 D17 D18 D19 D20 D21 D22 D23 D24: library part D01-0402-01-00000-1, "Led green 0402", Case/Package=0402, Colour=Green, Forward Current="20 mA", Forward Voltage=2.1V, Manufacturer=ROHM, Max Operating Temperature=85°C, Max Power Dissipation=52mW, Min Operating Temperature=-40°C, Dominant Wavelength="560 nm", Lens Style="Rectangular, Square", Luminous Intensity="10 mcd", Manufacturer P/N=SML-P13PTT86R, Mounting Technology=SMD, Number of LEDs=1, Pins=2, RoHS Compliant=Yes
FD1 FD2 FD3: library part CMP-00028-00005-2, "Fiducial - Round 1x2mm", Pins=0
J1 J2 J3: library part J01-001-01-00001-2, "Conn Socket and Terminal Strip HDR/SKT 100 POS 0.5mm Solder ST SMD T/R", Case/Package=SMD, Housing Color=Black, Manufacturer=Samtec, Max Operating Temperature=125°C, Min Operating Temperature=-55°C, Contact Material=Bronze, Contact Plating=Gold, Depth="4.98 mm", Gender=HERMAPHRODITIC, Housing Material=Polymer, Length="29.7 mm", Manufacturer P/N=LSHM-150-06.0-L-DV-A-N-K-TR, Mounting Technology=SMD, Number of Rows=2, Orientation=Straight, Pins=100, Pitch="500 µm", RoHS Compliant=Yes, Termination=Solder
J4: library part J01-001-01-00003-2, "6 Vias Pin Header 2.54mm, Right Angle", Case/Package="Through Hole", Housing Color=Black, Manufacturer=Samtec, Max Operating Temperature=125°C, Min Operating Temperature=-55°C, Contact Material=Bronze, Contact Plating=Gold, Depth="4.87 mm", Gender=Male, Housing Material=Polyester, Length="7.62 mm", Manufacturer P/N=TSW-103-08-F-D-RA, Mounting Technology="Through Hole", Number of Rows=2, Orientation=Straight, Pins=6, Pitch=2.54mm, RoHS Compliant=Yes, Termination=Solder
J5: library part J01-001-01-00005-2, "6 Vias Pin Header 2.54mm, Right Angle, 1 Row", Case/Package="Through Hole", Housing Color=Black, Manufacturer=Samtec, Max Operating Temperature=125°C, Min Operating Temperature=-55°C, Contact Material=Bronze, Contact Plating=Gold, Depth="4.87 mm", Gender=Male, Housing Material=Polyester, Length="7.62 mm", Manufacturer P/N=HTSW-106-08-F-S-RA, Mounting Technology="Through Hole", Number of Rows=2, Orientation=Straight, Pins=6, Pitch=2.54mm, RoHS Compliant=Yes, Termination=Solder
J6 J7: library part J01-001-01-00009-2, "Conn SMA RCP 0Hz to 18GHz 50Ohm Solder RA Thru-Hole Gold", Case/Package=TH, Housing Color=Gold, Manufacturer=Samtec, Max Operating Temperature=125°C, Min Operating Temperature=-65°C, Contact Material="Copper, Gold", Contact Plating=Gold, Depth=7mm, Gender=Female, Housing Material="Copper, Gold", Length=15.1mm, Manufacturer P/N=SMA-J-P-H-RA-TH1, Mounting Technology=TH, Number of Rows=1, Orientation="Right angle", Pins=5, Pitch=0, RoHS Compliant=Yes, Termination=solder
K1 K2 K3 K4 K5 K6 K7 K8 K9 K10 K11 K12 K13 K14 K15 K16 K17 K18 K19 K20 K21: library part K01-0008-01-00002-6, "Reed Relay 5VDC 350Ohm 0.5A SPST-NO THT", Case/Package=SIP, Coil Current=14.28mA, Coil Voltage (DC)=5V, Contact Current Rating=500mA, Contact Resistence=0.2, Insulation Resistance=1T, Manufacturer=COTO, Max Operating Temperature=85°C, Min Operating Temperature=-20°C, Switching Voltage=200V, Coil resitence=350, Coil Type=Non-Latching, Contact Form=SPST, Contact Material=Ruthenium, Height=7.6mm, Manufacturer P/N=9002-05-00, Mounting Technology="Through Hole", Number of Terminal=6, Operate Time=350µs, Packaging=Bulk, Pins=6, Relay Type=RF, Release Time=100µs, Rise time=350µs, RoHS=Yes, Switching Current=500mA, Width=19.3mm
MH1 MH2 MH3 MH4: library part CMP-00028-00007-1, "hole 5mm pad drill 2.2", Case/Package=Pad, Max Operating Temperature=-40°C, Min Operating Temperature=125°C, Mounting Technology=Pad, Pins=1, RoHS Compliant=yes
R1: library part R01-0402-01-00169-2, "RES SMD 10K OHM 1% 1/16W 0402", Case/Package=0402, Manufacturer=Yageo, Max Operating Temperature=155°C, Min Operating Temperature=-55°C, Power Rating=62.5mW, Temperature Coefficient="100 ppm/ºC", Tolerance=1%, Voltage Rating=50V, Composition="Thick Film", Features="Automotive AEC-Q200, Moisture Resistant", Height=370µm, Length=990.6µm, Manufacturer P/N=AC0402FR-0710KL, Number of Terminations=2, Packaging="Tape & Reel", RoHS=Yes, Width=508µm
R2 R3 R4 R5 R6 R7 R8 R9 R10 R11 R12 R13 R14 R15 R16 R17 R18 R19 R20 R21 R22 R23 R24 R25: library part R01-0402-01-00437-2, "RES SMD 240 OHM 1% 1/16W 0402", Case/Package=0402, Manufacturer=Yageo, Max Operating Temperature=155°C, Min Operating Temperature=-55°C, Power Rating=62.5mW, Temperature Coefficient="100 ppm/ºC", Tolerance=1%, Voltage Rating=50V, Composition="Thick Film", Features="Automotive AEC-Q200, Moisture Resistant", Height=370µm, Length=990.6µm, Manufacturer P/N=AC0402FR-07240RL, Number of Terminations=2, Packaging="Tape & Reel", RoHS=Yes, Width=508µm
U1 U3 U4: library part CMP-0005-0001-00001-1, "50-V, 7-ch darlington transistor array, -40 to 105C 16-TSSOP -40 to 105", Case/Package=TSSOP, Manufacturer="Texas Instruments", Max Operating Temperature=-40°C, Min Operating Temperature=105°C, Voltage Rating=50V, Height=1.2mm, Length=5mm, Manufacturer P/N=ULN2003AIPWR, Mounting Technology=SMD, Pins=16, RoHS Compliant=yes, Width=4.4mm
U2: library part U01-0007-01-00000-1, "AVR ATmega Microcontroller 8-bit 16MHz 256KB FLASH TQFP100", Case/Package=A, Frequency=16MHz, Manufacturer=Microchip, Max Operating Temperature=85°C, Max Supply Voltage=5.5V, Min Operating Temperature=-40°C, Minimum Supply Voltage=4.5V, Contact Plating=Tin, Core Architecture=AVR, Height=1.2mm, Interface="I2C, SPI, UART", Manufacturer P/N=ATMEGA2560-16AU, Max Frequency=16MHz, Memory Size=256KB, Memory Type=FLASH, Mounting Technology=SMD, Number of A/D="1 AD / 16 channels", Number of I/O=86, Number of Programmable I/O=86, Oscillator Type=External, Peripherals="Brown-out Detect/Reset, POR, PWM, WDT", Pins=100, RAM Size=8KB, RoHS=Yes, Watchdog Timer=Yes, Width=16.25mm
Y1: library part Y01-0001-01-00000-10, "16MHz ±10ppm 16pF 80Ω SMD-2520_4P", Case/Package=SMD-2520_4P, Frequency=16MHz, Load Capacitance=16pF, Max Operating Temperature=85°C, Min Operating Temperature=-40°C, ESR=80, Mounting Technology=SMD, Pins=4, RoHS Compliant=yes

## Free pads (board coordinates)
  round 0.5 on Mech1: 1(0.25,0.25) 1(0.25,0.25) 1(0.25,3937.26) 1(0.25,3937.26) 1(3937.26,0.25) 1(3937.26,0.25) 1(3937.26,3937.26) 1(3937.26,3937.26)

## Via types
v1: diameter 17.72, hole 7.87, L1 to L4, 303 vias

## Nets (pads, with @x,y where several pads share a name; then routed paths per layer and width w, separated by ;. In a path a pad name is that pad's centre, name@x,y a point inside that pad or via, vN(x,y) a via of type N, cw(c..) or ccw(c..) an arc to the next point about the centre after c; other vN are vias at no path point)
+5V: C1.2 C2.2 C3.2 C4.2 C5.2 C6.2 C7.2 C8.2 C9.2 J1.1 J1.3 J1.5 J2.2 J2.4 J2.6 J4.2 J5.1 K1.2 K2.2 K3.2 K4.2 K5.2 K6.2 K7.2 K8.2 K9.2 K10.2 K11.2 K12.2 K13.2 K14.2 K15.2 K16.2 K17.2 K18.2 K19.2 K20.2 K21.2 R1.2 R4.1 R5.1 R6.1 R7.1 R8.1 R9.1 R10.1 R11.1 R12.1 R13.1 R14.1 R15.1 R16.1 R17.1 R18.1 R19.1 R20.1 R21.1 R22.1 R23.1 R24.1 R25.1 U1.9 U2.10 U2.31 U2.61 U2.80 U2.98 U2.100 U3.9 U4.9 | length 2037.9
  L1 w4: R24.1@401,3339 402,3338 v1(402,3301) ; v1(411,1700) R12.1@411,1740.3 ; v1(412,2893) R19.1@412,2931 ; v1(419,1403) R6.1@419,1440.6 ; v1(420,2006) R18.1@420,2051.3 ; v1(421,2627) R13.1@421,2684 ; v1(422,2324) R7.1@422,2377.6 ; v1(424,172) 424,206 R5.1@425,207 ; v1(425,429) R11.1@425,473 ; v1(426,845) R17.1@426,885 ; v1(428,1078) R23.1@428,1118 ; J1.1@1486.97,310.51 J1.3@1506.65,310.51 J1.5@1526.34,310.51 ; v1(1584,2136) v1@1584.29,2136 ; C7.2@1598.34,1209.08 C7.2@1598.42,1209 ; C5.2@1603,2103.8 C5.2@1605.92,2100.88 ; C5.2@1609.58,2098 C5.2@1610.1,2097.48 ; C2.2@1920,1565 C2.2@1920.94,1565.94 ; v1(1983,2315) C6.2@2020,2315 C6.2@2019.37,2314.37 ; U3.9@2046.57,2888.08 2046.57,2882.34 U3.9@2052.9,2876 ; v1(2075.79,2911.79) v1@2076.21,2911.79 ; C1.2@2346.8,1802.2 C1.2@2347,1802 ; v1(2387,1681) R1.2@2387,1716.3 ; C9.2@2412.58,928 C9.2@2413.08,928.5 ; R4.1@2490.4,3839 2519,3839 v1(2533,3853) ; R22.1@3595,3151.3 3596,3150.3 v1(3596,3112) ; R16.1@3605,2873.3 3605,2819 v1(3606,2818) ; v1(3608,483) 3608,482 3596,470 3596,410 3599,407 R8.1@3621,407 ; R14.1@3611,723 3609,721 3612,718 v1(3612,677) ; v1(3613,2234) R25.1@3613,2290.3 ; v1(3614,2546) R10.1@3614,2584.3 ; v1(3615,1933) R21.1@3615,1982.6 ; v1(3616,1002) R20.1@3616,1050 ; R15.1@3620,1674.6 3620,1622 v1(3621,1621) ; v1(3621,1315) R9.1@3621,1357.6
  L1 w10: v1@1584.29,2136 1603,2117.29 C5.2@1603,2103.8 ; v1(1590,1777) 1599,1777 1605,1771 1605,1751 1612.85,1743.15 U2.98@1671.93,1743.15 ; U1.9@1597.92,1161.57 C7.2@1597.92,1199.92 ; v1(1598,1245) 1598,1209.42 C7.2@1598.34,1209.08 ; C5.2@1602.52,2097.48 1610.1,2097.48 U2.80@1671.93,2097.48 ; v1(1610.29,1669.29) C4.2@1610.29,1704 ; C4.2@1619,1703 1619.78,1703.78 U2.100@1671.93,1703.78 ; C2.2@1920,1565 1921,1566 v1(1954,1566) ; C2.2@1920.94,1565.94 U2.10@1920.94,1631.93 ; U2.61@2019.37,2248.07 C6.2@2019.37,2314.37 ; U3.9@2052.9,2876 C8.2@2089,2876 2089,2899 v1@2076.21,2911.79 ; U2.31@2288.07,1802.2 C1.2@2346.8,1802.2 ; v1(2335,1829) 2347,1817 C1.2@2347,1796.58 ; C9.2@2412.58,928 v1(2458,928) ; C9.2@2413.08,928.5 U4.9@2413.08,972.43
  L4 w4: J2.2@1486.97,310.51 J2.4@1506.65,310.51 J2.6@1526.34,310.51
  other v1: 1518,240 1495,241 1517,262 1494,263 1494,370 1518,370 1518,393 1495,394
A: J1.7 J2.8 K1.4 K2.4 | length 969.2
  L1 w11.55: K1.4@1211,238 1315,238 1338,261 1338,345 1365,372 1410,372 1469,431 1539.23,431 1546,424.23 v1(1546,398) J1.7@1546.02,310.51 ; K1.4@1212,239 K2.4@1212,540
  L4 w11.55: J2.8@1546.02,310.51 v1(1546,398)
ALARM: R2.1 U2.24 | length 4106.6
  L1 w4: R2.1@1476,3839 1478,3841 v1(1527,3841) ; U2.24@2196.54,1631.93 2196.54,1575.46 2252,1520 2563,1520 2587,1544 2587,3123 2569,3141 2569,3177 2582,3190 2615,3190 v1(2617,3192)
  L4 w4: v1(1527,3841) 1643,3841 1677,3807 2627,3807 2755,3679 2755,3260 2687,3192 v1(2617,3192)
B: J1.9 J2.10 K3.4 K4.4 | length 1180
  L1 w4: 1203,712 1205,714
  L1 w11.55: K3.4@1205,836 1205,714 1205,661 1275,591 1275,536 1312,499 1536,499 1565.71,469.29 v1(1565.71,372.71) J1.9@1565.71,310.51 ; K4.4@1207,1144 1207,838 K3.4@1209,836
  L4 w11.55: J2.10@1565.71,310.51 v1(1565.71,372.71)
C: J1.11 J2.12 K5.4 K6.4 | length 1804.8
  L1 w11.55: K6.4@1206,1765 K5.4@1206,1455 1208,1453 1208,1229 1280,1157 1280,761 1334,707 1334,597 1365,566 1546,566 1585.39,526.61 v1(1585.39,397.61) J1.11@1585.39,310.51
  L4 w11.55: J2.12@1585.39,310.51 v1(1585.39,397.61)
COIL0: D4.1 K1.3 U1.16 | length 2087.3
  L1 w4: D4.1@367,208.57 366,207.57 371,202.57 v1(371,176) ; v1(969,102) 1011,144 K1.3@1011,238 1011,247 1020,247 1083,310 1130,310 1166,346 v1(1166,977) ; v1(1540.43,979.72) 1543.14,982.43 U1.16@1597.92,982.43
  L4 w4: v1(371,176) 398,149 922,149 v1(969,102) ; v1(1166,977) 1168.72,979.72 v1(1540.43,979.72)
COIL1: D10.1 K2.3 U1.15 | length 1962.6
  L1 w4: v1(373,432) D10.1@373,474 ; v1(924,998) 924,753 1013,664 K2.3@1013,541 ; v1(1525.23,1008.77) 1525.98,1008.02 U1.15@1597.92,1008.02
  L4 w4: v1(373,432) 398,407 912,407 951,446 990,446 1013,469 K2.3@1013,541 ; v1(924,998) 1514.3,998 1525.07,1008.77 v1(1525.23,1008.77)
COIL2: D16.1 K3.3 U1.14 | length 1630.1
  L1 w4: v1(332,886) 363.73,886 365.73,884 D16.1@367,885.27 ; v1(956,1023.86) 956,854.15 974.15,836 K3.3@1009,836 ; v1(1542,1035) 1542.69,1034.31 1597.23,1034.31 U1.14@1597.92,1033.61
  L4 w4: v1(332,886) 991,886 1009,868 K3.3@1009,836 ; v1(956,1023.86) 1499.86,1023.86 1511,1035 v1(1542,1035)
COIL3: D22.1 K4.3 U1.13 | length 1621.7
  L1 w4: v1(370,1076) D22.1@370,1119.38 ; v1(1524,1063) 1525.9,1061.1 1596.02,1061.1 U1.13@1597.92,1059.2
  L4 w4: v1(370,1076) 387,1059 976,1059 1007,1090 K4.3@1007,1144 1007,1239 1040,1272 1300,1272 1326,1246 1326,1110 1372,1064 1523,1064 v1(1524,1063)
COIL4: D5.1 K5.3 U1.12 | length 1690.9
  L1 w4: v1(359,1401) D5.1@359,1440.57 ; K5.3@1006,1455 1006,1326 1038,1294 v1(1073,1294) ; v1(1542,1089) 1544.1,1086.9 1595.82,1086.9 U1.12@1597.92,1084.8
  L4 w4: v1(359,1401) 359,1381 378,1362 980,1362 1006,1388 K5.3@1006,1455 ; v1(1073,1294) 1327,1294 1352,1269 1352,1136 1398,1090 1541,1090 v1(1542,1089)
COIL5: D11.1 K6.3 U1.11 | length 2048.3
  L1 w4: D11.1@352,1740.57 353,1739.57 v1(353,1699) ; v1(974,1314) 972,1314 959,1327 959,1513 1003,1557 K6.3@1003,1765 ; v1(1522,1109) 1522.69,1109.69 1597.23,1109.69 U1.11@1597.92,1110.39
  L4 w4: v1(353,1699) 353,1696 379,1670 982,1670 1003,1691 K6.3@1003,1765 ; v1(974,1314) 1341,1314 1375,1280 1375,1154 1420,1109 v1(1522,1109)
COIL6: D17.1 K7.3 U1.10 | length 2495.4
  L1 w4: v1(358,2006) 358,2048.57 D17.1@361,2051.57 ; v1(919,1301) 934,1316 934,1869 1011,1946 K7.3@1011,2078 ; v1(1541,1137) 1541.51,1136.49 1597.41,1136.49 U1.10@1597.92,1135.98
  L4 w4: v1(358,2006) 411,1953 959,1953 1011,2005 K7.3@1011,2078 ; v1(919,1301) 919,1323 934,1338 1357,1338 1405,1290 1405,1165 1433,1137 v1(1541,1137)
COIL7: D6.1 K8.3 U3.16 | length 2741.1
  L1 w4: v1(362,2324) 362,2376.57 D6.1@363,2377.57 ; v1(940,3131) 940,3128.8 933,3121.8 933,2650 1012,2571 K8.3@1012,2390 ; U3.16@1867.43,2888.08 1867.43,2946.43 v1(1868.07,2947.07)
  L4 w4: v1(362,2324) 362,2290 402,2250 986,2250 1012,2276 K8.3@1012,2390 ; v1(940,3131) 940,3094 982,3052 1235,3052 1305,2982 1833.15,2982 v1(1868.07,2947.07)
COIL8: D12.1 K9.3 U3.15 | length 2483
  L1 w4: v1(361,2626) 361,2683.57 D12.1@362,2684.57 ; v1(989,3142) 950,3103 950,2757 K9.3@1010,2697 ; U3.15@1893.02,2888.08 v1(1893,2976)
  L4 w4: v1(361,2626) 359,2624 359,2574 391,2542 987,2542 1010,2565 K9.3@1010,2697 ; v1(989,3142) 989,3110 1020,3079 1265,3079 1329,3015 1854,3015 v1(1893,2976)
COIL9: D18.1 K10.3 U3.14 | length 2064.3
  L1 w4: v1(353,2896) D18.1@353,2933 ; K10.3@1008,2993 1008,3097 v1(1041,3130) ; v1(1918,2949) 1918.31,2948.69 1918.31,2888.39 U3.14@1918.61,2888.08
  L4 w4: v1@352,2896 352,2858 366,2844 983,2844 1008,2869 K10.3@1008,2993 ; v1(1041,3130) 1042,3130 1042,3129 1061,3110 1290,3110 1355,3045 1871,3045 1918,2998 v1(1918,2949)
COIL10: D23.1 K11.3 U3.13 | length 2525.7
  L1 w4: v1(290,3337) 340.92,3337 D23.1@342,3338.08 ; K11.3@1001,3283 1001,3240 1027,3214 1082,3214 1098,3198 v1(1098,3142) ; U3.13@1944.2,2888.08 1944.6,2888.48 1944.6,2974.6 v1(1945,2975)
  L4 w4: v1(290,3337) 330,3377 330,3579 363,3612 934,3612 1001,3545 K11.3@1001,3283 ; v1(1098,3142) 1112,3128 1318,3128 1369,3077 1883,3077 1945,3015 v1(1945,2975)
COIL11: D7.1 K12.3 U4.10 | length 1804.7
  L1 w4: U4.10@2413.08,998.02 2413.59,997.51 2526.49,997.51 v1(2527,997) ; v1(2941,888) 2983,846 2983,561 3025,519 K12.3@3025,426 ; D7.1@3669,407.57 3670,406.57 v1(3670,379)
  L4 w4: v1(2527,997) 2528,996 2528,935 2575,888 v1(2941,888) ; K12.3@3025,426 3034,426 3034,417 3072,379 v1(3670,379)
COIL12: D13.1 K13.3 U4.11 | length 1698.2
  L1 w4: U4.11@2413.08,1023.61 2413.89,1022.81 2485.19,1022.81 v1(2486,1022) ; v1(2999,904) 3028,875 K13.3@3028,754 ; v1(3659,680) D13.1@3659,722.38
  L4 w4: v1(2486,1022) 2554,1022 2573,1003 2573,955 2615,913 2986.99,913 2995.99,904 v1(2999,904) ; K13.3@3028,754 3028,621 3053,596 3611,596 3659,644 v1(3659,680)
COIL13: D19.1 K14.3 U4.12 | length 1566.6
  L1 w4: U4.12@2413.08,1049.2 2413.68,1048.6 2528.4,1048.6 v1(2529,1048) ; v1(3006,940) 3027,961 K14.3@3027,1079 ; v1(3664,1002) D19.1@3664,1051
  L4 w4: v1(2529,1048) 2530,1047 2592,1047 2621,1018 2621,970 2651,940 v1(3006,940) 3636,940 3664,968 v1(3664,1002)
COIL14: D8.1 K15.3 U4.13 | length 1670.5
  L1 w4: U4.13@2413.08,1074.8 2413.68,1075.4 2486.4,1075.4 v1(2487,1076) ; v1(3002,1211) 3027,1236 K15.3@3027,1390 ; v1(3668,1317) D8.1@3668,1358
  L4 w4: v1(2487,1076) 2488,1075 2738,1075 2804,1141 2969,1141 3002,1174 v1(3002,1211) 3022,1211 3033,1200 3642,1200 3668,1226 v1(3668,1317)
COIL15: D14.1 K16.3 U4.14 | length 2097.3
  L1 w4: U4.14@2413.08,1100.39 2413.39,1100.69 2527.69,1100.69 v1(2528,1101) ; K16.3@3028,1697 3028,1590 3076,1542 3076,1241 3064,1229 v1(3064,1228) ; D14.1@3666,1675 3668,1673 v1(3668,1621)
  L4 w4: v1(2528,1101) 2732,1101 2796,1165 2951,1165 2971,1185 2971,1220 2985,1234 3030,1234 3036,1228 v1(3064,1228) ; K16.3@3028,1697 3028,1588 3066,1550 3640,1550 3668,1578 v1(3668,1621)
COIL16: D20.1 K17.3 U4.15 | length 2506
  L1 w4: U4.15@2413.08,1125.98 v1(2486,1126) ; K17.3@3019,2008 3019,1869 3096,1792 3096,1574 3129,1541 3129,1256 v1(3115,1242) ; D20.1@3671,1984 3672,1983 v1(3672,1934)
  L4 w4: v1(2486,1126) 2487,1125 2719,1125 2783,1189 2939,1189 2951,1201 2951,1242 2967,1258 3099,1258 v1(3115,1242) ; K17.3@3019,2008 3019,1886 3056,1849 3629,1849 3672,1892 v1(3672,1934)
COIL17: D24.1 K18.3 U4.16 | length 2566.9
  L1 w4: U4.16@2413.08,1151.57 2413.86,1150.78 2527.22,1150.78 v1(2528,1150) ; v1(2895,1226) 2895,1244 2986,1335 2986,1763 2972,1777 2972,2137 3015,2180 K18.3@3015,2309 ; D24.1@3668,2290.38 3669,2289.38 v1(3669,2235)
  L4 w4: v1(2528,1150) 2529,1151 2702,1151 2777,1226 v1(2895,1226) ; K18.3@3015,2309 3015,2189 3051,2153 3638,2153 3669,2184 v1(3669,2235)
COIL18: D9.1 K19.3 U3.10 | length 2568.6
  L1 w4: v1(2020,2945) 2020.49,2944.51 2020.49,2888.57 U3.10@2020.98,2888.08 ; K19.3@3012,2614 3101,2703 v1(3101,3036) ; v1(3669,2544) D9.1@3669,2585
  L4 w4: v1(2020,2945) 2020,2976 2031,2987 3080,2987 3101,3008 v1(3101,3036) ; K19.3@3012,2614 3012,2492 3042,2462 3643,2462 3669,2488 v1(3669,2544)
COIL19: D15.1 K20.3 U3.11 | length 2180.7
  L1 w4: U3.11@1995.39,2888.08 1995.69,2888.39 1995.69,2976.69 v1(1996,2977) ; K20.3@3013,2895 v1(3013,3039) ; D15.1@3661,2872.57 3662,2871.57 v1(3662,2817)
  L3 w4: K20.3@3012,2894 K20.3@3013,2895
  L4 w4: v1(1996,2977) 1996,3001 2017,3022 2996,3022 v1(3013,3039) ; K20.3@3012,2894 3012,2771 3035,2748 3631,2748 3662,2779 v1(3662,2817)
COIL20: D21.1 K21.3 U3.12 | length 2023.3
  L1 w4: U3.12@1969.8,2888.08 1970.4,2888.68 1970.4,2946.4 v1(1971,2947) ; v1(2975,3053) 3012,3090 K21.3@3012,3182 ; v1(3650,3113) D21.1@3650,3152
  L4 w4: v1(1971,2947) 1971,3003 2021,3053 v1(2975,3053) 3011,3089 3626,3089 v1(3650,3113)
COM: J1.67 J2.68 | length 145.5
  L1 w4: v1(2136,383) v1@2136.29,382.71 ; J1.67@2136.29,310.8 J1.67@2136.57,310.51
  L1 w10: J1.67@2136.29,310.8 v1@2136.29,382.71
  L4 w4: v1(2136,383) v1@2136.29,382.71 ; J2.68@2136.29,310.8 J2.68@2136.57,310.51
  L4 w10: J2.68@2136.29,310.8 v1@2136.29,382.71
D: J1.13 J2.14 K7.4 K8.4 | length 2395.4
  L1 w4: 1205,1954 1205.5,1954.5
  L1 w11.55: K8.4@1212,2390 1213,2389 1213,2080 1209,2076 1209,1898 1269,1838 1269,1348 1347,1270 1347,790 1385,752 1385,659 1416,628 1564,628 1605.08,586.92 v1(1605.08,372.92) J1.13@1605.08,310.51
  L4 w11.55: J2.14@1605.08,310.51 v1(1605.08,372.92)
DATA: R3.1 U2.23 | length 3642.2
  L1 w4: R3.1@2007,3838 2010,3835 v1(2053,3835) ; U2.23@2176.85,1631.93 2176.85,1572.15 2245,1504 2566,1504 2600,1538 v1(2600,3155)
  L4 w4: v1(2053,3835) 2167,3835 2176,3826 2643,3826 2777,3692 2777,3231 2701,3155 v1(2600,3155)
E: J1.15 J2.16 K9.4 K10.4 | length 3038.7
  L1 w4: K10.4@1208,2993 K10.4@1209.5,2991.5 ; K9.4@1208.5,2698.5 K9.4@1210,2697
  L1 w11.55: K10.4@1202,2987 K10.4@1208,2993 ; K9.4@1208.5,2698.5 K10.4@1208.5,3003.5 ; K9.4@1210,2697 1209,2696 1209,2507 1290,2426 1290,1957 1344,1903 1344,1366 1409,1301 1409,809 1434,784 1434,705 1449,690 1578,690 1624.76,643.24 v1(1624.76,396.76) J1.15@1624.76,310.51
  L4 w11.55: J2.16@1624.76,310.51 v1(1624.76,396.76)
F: J1.17 J2.18 K19.4 K20.4 | length 3655.6
  L1 w11.55: J1.17@1644.45,310.51 v1(1644.45,373.55) 1644.45,638.45 1707,701 2604,701 2636,733 2636,2320 2812,2496 K19.4@2812,2614 K20.4@2812,2894
  L4 w11.55: J2.18@1644.45,310.51 v1(1644.45,373.55)
G: J1.19 J2.20 K17.4 K18.4 | length 3120.5
  L1 w4: K18.4@2804,2309 K18.4@2808,2305 ; K17.4@2815,2012 K17.4@2819,2008
  L1 w11.55: J1.19@1664.13,310.51 v1(1664.13,393.87) 1664.13,569.13 1731,636 2675,636 2706,667 2706,1770 2819,1883 K17.4@2819,2008 ; K17.4@2815,2012 K18.4@2815,2309
  L4 w11.55: J2.20@1664.13,310.51 v1(1664.13,393.87)